# Altium PCB UPCNSL-ABS-EPS_test-v1.0.1.PcbDoc
Units mm, origin at the board's own origin, x right, y up, seen from the top; angles counter-clockwise.
Board outline 89.15 x 98.53 mm, 2 copper layers (Top Layer, Bottom Layer); 85 components, 60 nets, 273 pads, 17 vias.
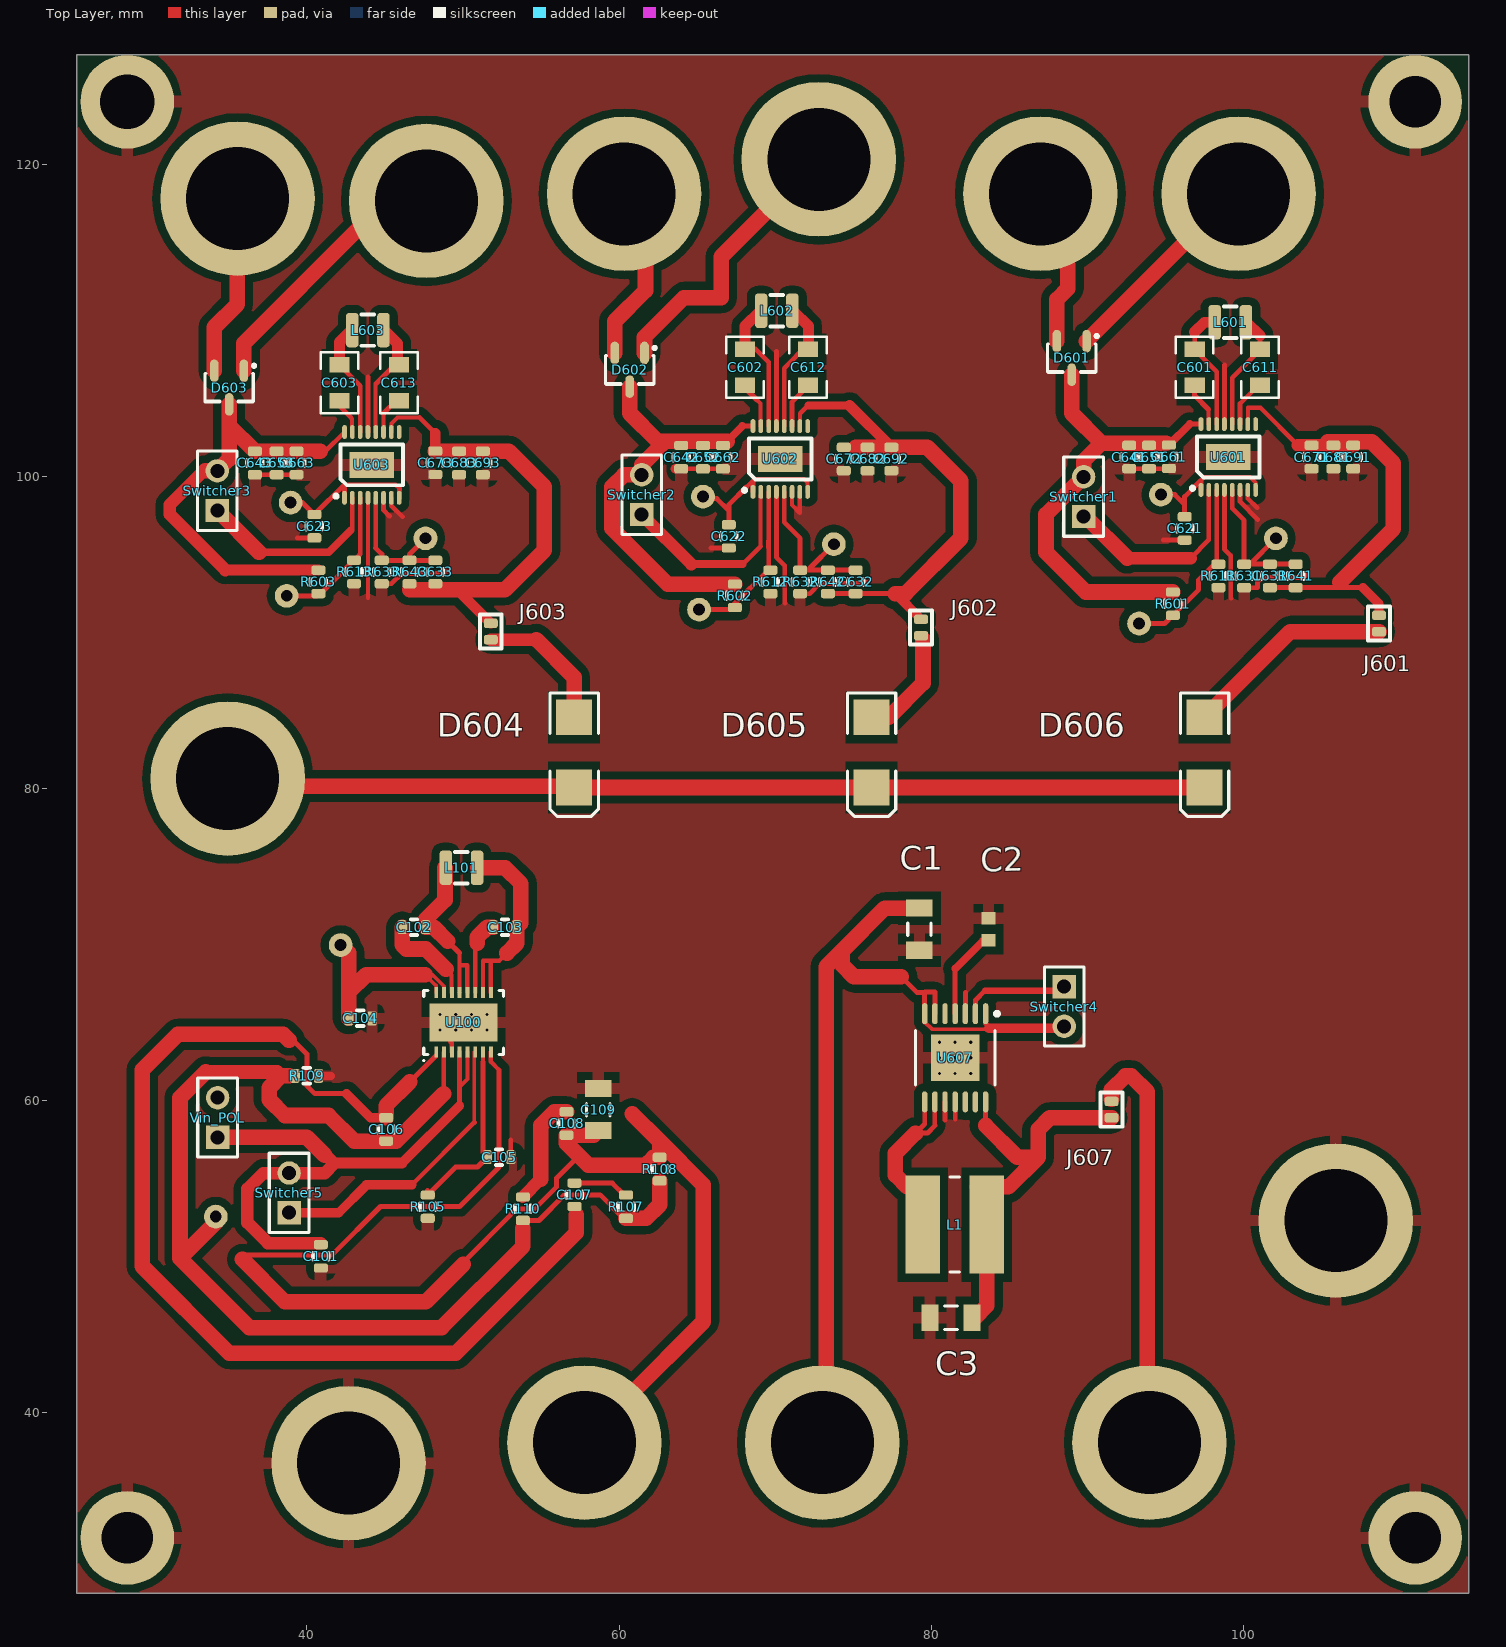
[diagram p0: Top Layer view]
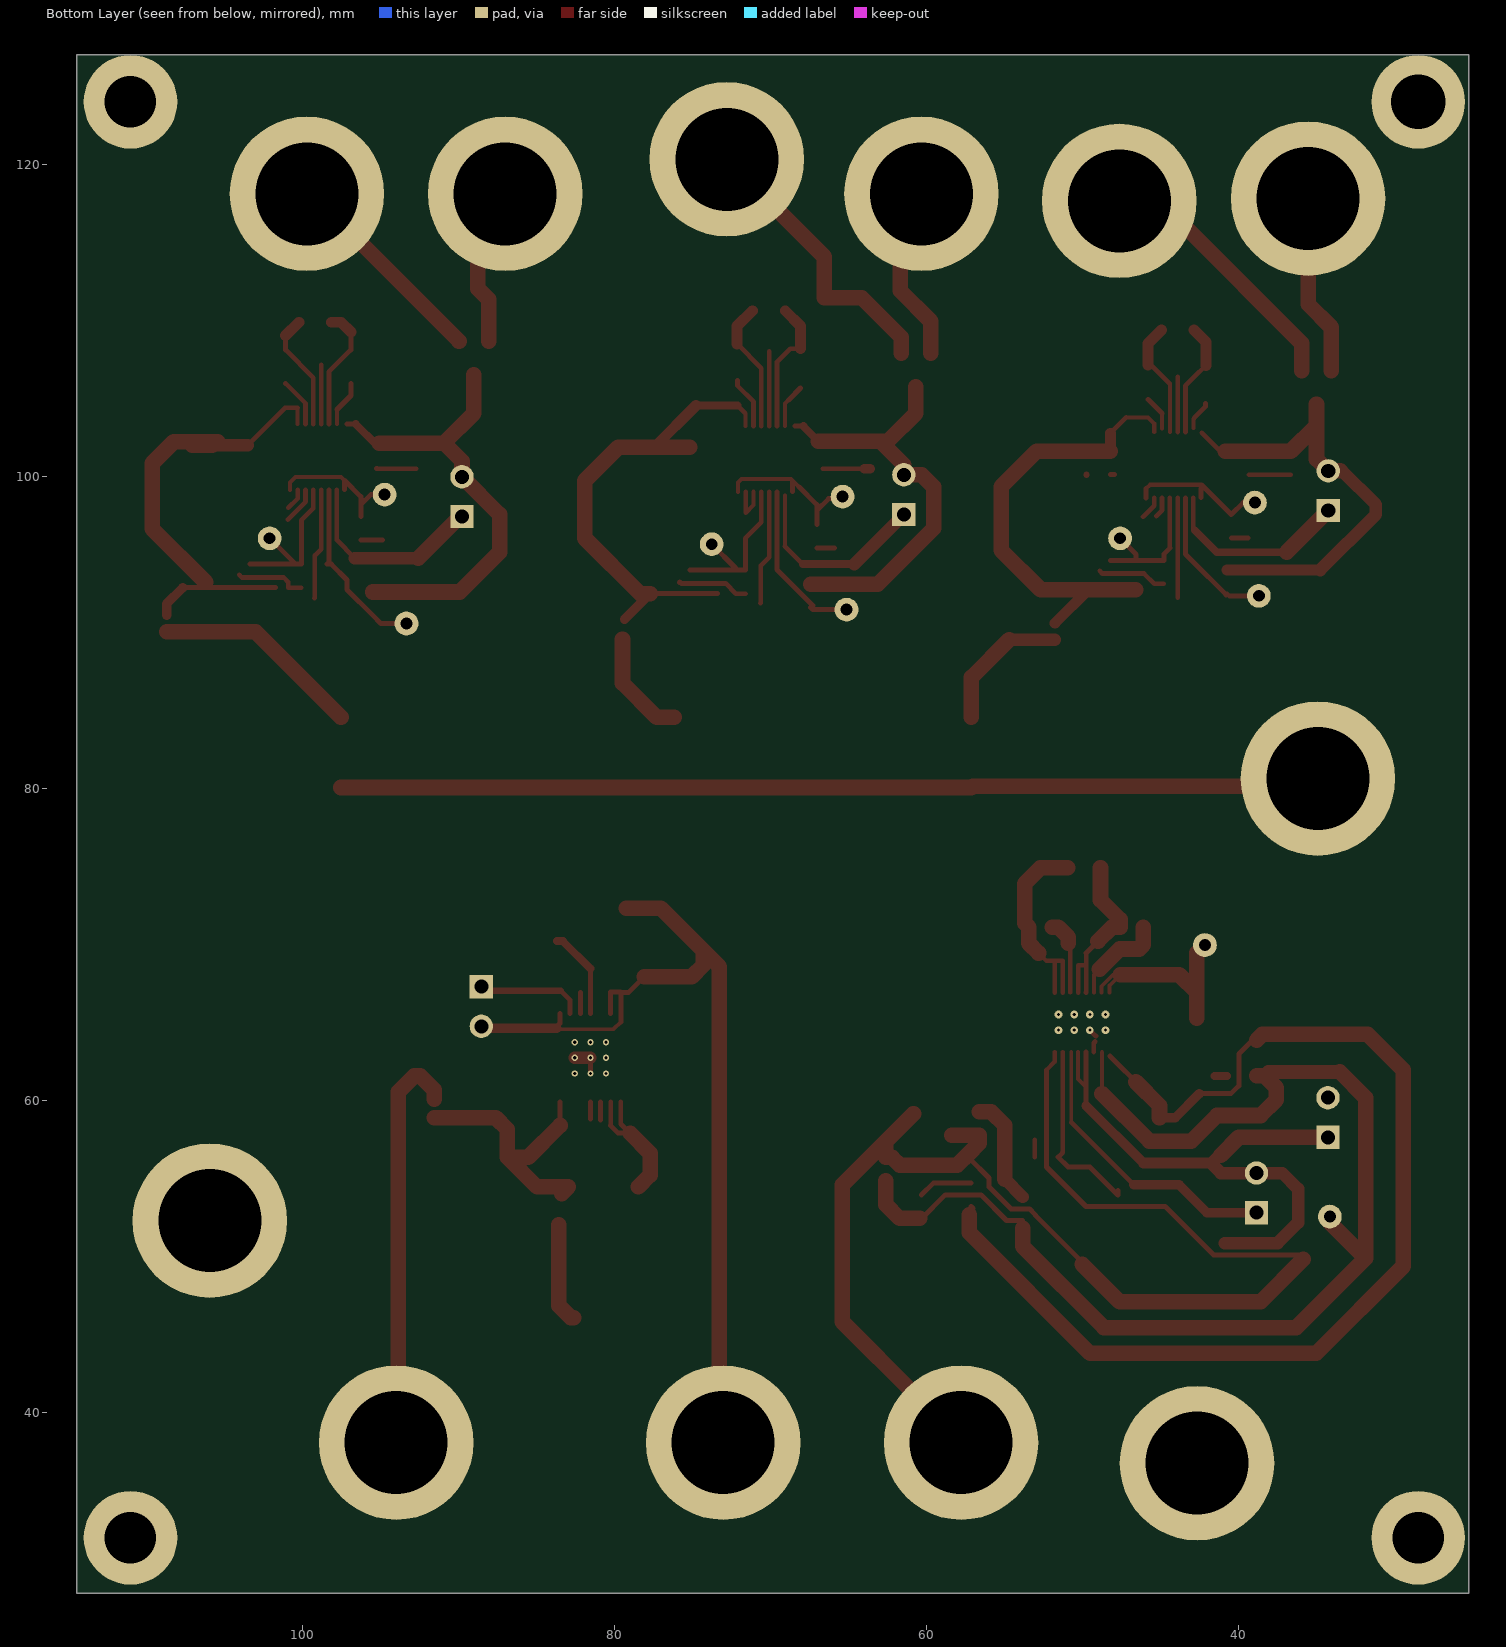
[diagram p1: Bottom Layer view, seen from below]
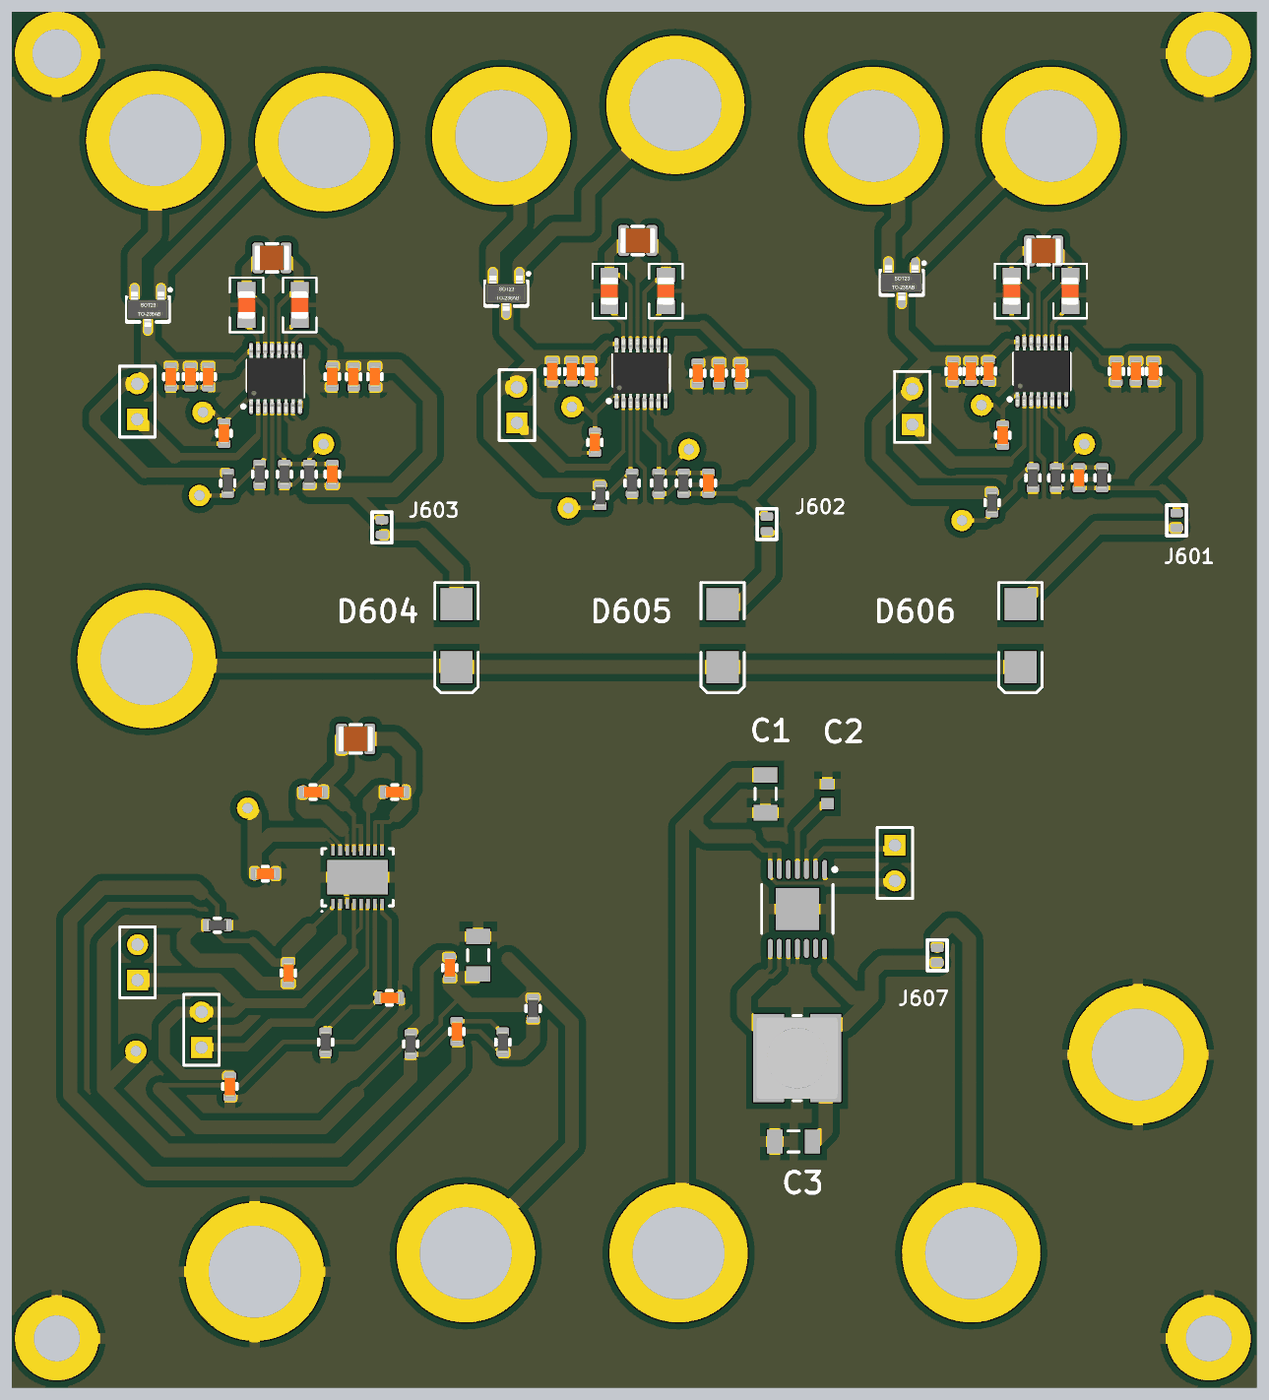
[diagram p2: 3D render of the assembled board from above, using the file's embedded part models]

## Layer stack, top to bottom
Top Solder: solder mask 0.0102, Solder Resist, Dk 3.5
Top Layer: signal copper 0.0356
Dielectric 1: dielectric 0.32, FR-4, Dk 4.8
Bottom Layer: signal copper 0.0356
Bottom Solder: solder mask 0.0102, Solder Resist, Dk 3.5

## Board outline
25.273,28.465 68.961,28.465 114.427,28.465 114.427,127 25.273,127 25.273,76.2

## Design rules (kind name [scope] priority, off if disabled: settings)
Clearance Clearance_GND [InNamedPolygon('GND')] p1: gap=0.5
Clearance Clearance_U [(InComponent('U601') OR InComponent('U100') OR InComponent('U602') OR InComponent('U603') OR InComponent('U607'))] p2: gap=0.2
Clearance [All] p3: gap=0.2
PolygonConnect [All] p1: connectstyle=Relief reliefconductorwidth=0.75 reliefentries=4 polygonreliefangle="90 Angle" airgapwidth=0.5
RoutingVias [All] p1: holewidth=0.711 width=1.27 viastyle="Through Hole" minholewidth=0.2 minwidth=0.4 maxholewidth=0.711 maxwidth=1.27
SolderMaskExpansion [All] p1: expansion=0.102
UnpouredPolygon [All] p1: allowunpoured=FALSE
Width [All] p1: maxlimit=1 minlimit=0.22 preferedwidth=1
29 further rules are at their usual default settings.

## Components (designator, comment, footprint, x,y, rotation, side; value= is the part's Value field where it differs from the comment)
C1 "Cap Semi" C1206 79.248,70.993 r270 top
C2 "Cap Semi" 1608[0603] 83.677,70.993 r90 top
C3 "Cap Semi" C1206 81.264,46.101 r180 top
C101 "CAP0603" CAP0603 40.894,50.038 r90 top
C102 "CAP0603" CAP0603 46.855,71.12 r0 top
C103 "CAP0603" CAP0603 52.697,71.12 r0 top
C104 "CAP0603" CAP0603 43.426,65.278 r180 top
C105 "CAP0603" CAP0603 52.316,56.388 r180 top
C106 "CAP0603" CAP0603 45.077,58.166 r90 top
C107 "CAP0603" CAP0603 57.142,53.975 r90 top
C108 "CAP0603" CAP0603 56.634,58.547 r90 top
C109 "Cap Semi" C1206 58.674,59.436 r90 top
C601 "CAP0805" CAP0805W 96.876,107 r90 top
C602 "CAP0805" CAP0805W 68.072,107 r90 top
C603 "CAP0805" CAP0805W 42.088,106 r90 top
C611 "CAP0805" CAP0805W 101.067,107 r90 top
C612 "CAP0805" CAP0805W 72.111,107 r90 top
C613 "CAP0805" CAP0805W 45.898,106 r90 top
C621 "CAP0603" CAP0603 96.241,96.672 r90 top
C622 "CAP0603" CAP0603 67.031,96.164 r90 top
C623 "CAP0603" CAP0603 40.48,96.811 r90 top
C631 "CAP0603" CAP0603 101.702,93.624 r90 top
C632 "CAP0603" CAP0603 75.159,93.243 r90 top
C633 "CAP0603" CAP0603 48.227,93.878 r90 top
C641 "CAP0603" CAP0603 92.685,101.244 r90 top
C642 "CAP0603" CAP0603 63.983,101.232 r90 top
C643 "CAP0603" CAP0603 36.67,100.863 r90 top
C651 "CAP0603" CAP0603 93.955,101.244 r90 top
C652 "CAP0603" CAP0603 65.38,101.232 r90 top
C653 "CAP0603" CAP0603 38.067,100.863 r90 top
C661 "CAP0603" CAP0603 95.225,101.261 r90 top
C662 "CAP0603" CAP0603 66.65,101.232 r90 top
C663 "CAP0603" CAP0603 39.337,100.863 r90 top
C671 "CAP0603" CAP0603 104.369,101.244 r90 top
C672 "CAP0603" CAP0603 74.397,101.117 r90 top
C673 "CAP0603" CAP0603 48.227,100.875 r90 top
C681 "CAP0603" CAP0603 105.766,101.244 r90 top
C682 "CAP0603" CAP0603 75.921,101.117 r90 top
C683 "CAP0603" CAP0603 49.751,100.863 r90 top
C691 "CAP0603" CAP0603 107.036,101.244 r90 top
C692 "CAP0603" CAP0603 77.445,101.117 r90 top
C693 "CAP0603" CAP0603 51.275,100.863 r90 top
D601 "HSMS-2824-TR1G" SOT23-3 89.002,107.594 r180 top
D602 "HSMS-2824-TR1G" SOT23-3 60.681,106.832 r180 top
D603 "HSMS-2824-TR1G" SOT23-3 35.019,105.689 r180 top
D604 "D Schottky" SMB 57.125,82.321 r270 top
D605 "D Schottky" SMB 76.175,82.321 r270 top
D606 "D Schottky" SMB 97.511,82.321 r270 top
J601 "Jumper_Solderpad" JUMPER_SOLDERPAD 108.687,90.576 r270 top
J602 "Jumper_Solderpad" JUMPER_SOLDERPAD 79.35,90.322 r270 top
J603 "Jumper_Solderpad" JUMPER_SOLDERPAD 51.783,90.068 r270 top
J607 "" JUMPER_SOLDERPAD 91.551,59.436 r90 top
L1 "744052150" WE-TPC-5818-L 81.518,52.07 r0 top
L101 "74479787247" 74479787247 49.903,74.93 r180 top
L601 "" 74479787247 99.162,109.88 r0 top
L602 "" 74479787247 70.104,110.617 r0 top
L603 "" 74479787247 43.909,109.372 r0 top
R105 "RES0603" RES0603 47.744,53.213 r90 top
R107 "RES0603" RES0603 60.444,53.213 r90 top
R108 "RES0603" RES0603 62.603,55.626 r90 top
R109 "RES0603" RES0603 39.997,61.595 r180 top
R110 "RES0603" RES0603 53.84,53.086 r90 top
R601 "RES0603" RES0603 95.479,91.846 r90 top
R602 "RES0603" RES0603 67.42,92.354 r90 top
R603 "RES0603" RES0603 40.742,93.243 r90 top
R611 "RES0603" RES0603 98.4,93.624 r90 top
R612 "RES0603" RES0603 69.698,93.243 r90 top
R613 "RES0603" RES0603 43.02,93.878 r90 top
R631 "RES0603" RES0603 100.051,93.624 r90 top
R632 "RES0603" RES0603 71.603,93.243 r90 top
R633 "RES0603" RES0603 44.798,93.878 r90 top
R641 "RES0603" RES0603 103.353,93.624 r90 top
R642 "RES0603" RES0603 73.381,93.243 r90 top
R643 "RES0603" RES0603 46.576,93.878 r90 top
Switcher1 "" HDR1X2 89.764,97.434 r90 top
Switcher2 "" HDR1X2 61.451,97.561 r90 top
Switcher3 "" HDR1X2 34.265,97.815 r90 top
Switcher4 "" HDR1X2 88.519,67.31 r270 top
Switcher5 "" HDR1X2 38.862,52.832 r90 top
U100 "LTC3112EDHD#PBF" LT-DHD-16_V 50.038,65.024 r90 top
U601 "LTC3129IMSE" MSOP-16 99.035,101.244 r0 top
U602 "LTC3129IMSE" MSOP-16 70.333,101.117 r0 top
U603 "LTC3129IMSE" MSOP-16 44.163,100.736 r0 top
U607 "LM2852YMXA-3.3/NOPB" MXA14A_L 81.534,62.754 r270 top
Vin_POL "Vin_3.8V" HDR1X2 34.282,57.658 r90 top

## Footprints (in the part's own frame and the unit in brackets; to place one, negate y for a bottom-side part, rotate by r counter-clockwise, add the part's x,y. Pads: shape width x height; smd on the part's side, far side on the other; paste and mask are expansions set on the pad)
1608[0603] [mm] "Chip Capacitor, Body 1.6x0.8mm, IPC High Density"
  rect 0.8x0.9 smd: 1(-0.7,0) 2(0.7,0)
  body extent -0.87,-0.48 0.87,0.48, height 1.3
74479787247 [mm] "INDUCTOR, 4.7UH, 1.25A, 40MHZ"
  rrect50% 0.8x2.2 smd: 1(-1,0) 2(1,0)
  silkscreen extent -0.4,-1 0.4,1, body extent -1.25,-0.9 1.25,0.9, height 1.8
C1206 [mm] "Chip Capacitor, Body 3.2x1.6mm, IPC High Density"
  rect 1.1x1.7 smd: 1(-1.35,0) 2(1.35,0)
  silkscreen extent -0.4,-0.75 0.4,0.75, body extent -1.7,-0.9 1.7,0.9, height 1.3
CAP0603 [mm] "Capacitor Chip Inductor, Body 0.6x0.3mm, IPC High Density"
  rrect50% 0.6x0.9 smd: 1(-0.75,0) 2(0.75,0)
  silkscreen extent -0.2,-0.5 0.2,0.5, body extent -0.76,-0.38 0.76,0.38, height 0.76
CAP0805W [mm] "capacitor 0805 wave soldering"
  rect 1x1.3 smd: 1(-1.15,0) 2(1.15,0)
  silkscreen extent -1.95,-1.2 1.95,1.2, body extent -1,-0.63 1,0.63, height 0.78
HDR1X2 [mm] "Connector; Header; 2 Position"
  rect 1.5x1.5 hole 0.9: 1(0,0)
  round 1.5 hole 0.9: 2(2.54,0)
  silkscreen extent -1.27,-1.27 3.81,1.27
JUMPER_SOLDERPAD [mm]
  rrect50% 0.6x0.9 smd: 1(-0.525,0) 2(0.525,0)
  silkscreen extent -1.1,-0.7 1.1,0.7
LT-DHD-16_V [mm] "SON, 16-Leads, Body 5x4mm, Pitch 0.5mm, Thermal Pad 4.34x2.44mm"
  rect 0.7x0.25 smd: 1(-1.9,1.75) 2(-1.9,1.25) 3(-1.9,0.75) 4(-1.9,0.25) 5(-1.9,-0.25) 6(-1.9,-0.75) 7(-1.9,-1.25) 8(-1.9,-1.75) 9(1.9,-1.75) 10(1.9,-1.25) 11(1.9,-0.75) 12(1.9,-0.25) 13(1.9,0.25) 14(1.9,0.75) 15(1.9,1.25) 16(1.9,1.75)
  rect 2.44x4.34 smd: 17(0,0)
  silkscreen extent -2.5,-2.55 2.05,2.6, body extent -2,-2.5 2,2.5, height 0.8
MSOP-16 [mm] "16-Lead Plastic MSOP, Exposed Die Pad"
  oval 0.3x0.889 smd: 1(-1.75,-2.107) 2(-1.25,-2.107) 3(-0.75,-2.107) 4(-0.25,-2.107) 5(0.25,-2.107) 6(0.75,-2.107) 7(1.25,-2.107) 8(1.75,-2.107) 9(1.75,2.107) 10(1.25,2.107) 11(0.75,2.107) 12(0.25,2.107) 13(-0.25,2.107) 14(-0.75,2.107) 15(-1.25,2.107) 16(-1.75,2.107)
  rect 2.845x1.651 smd: 17(0,0)
  silkscreen extent -2.4,-2.1 2,1.3, body extent -2.02,-2.45 2.02,2.45, height 0.96
MXA14A_L [mm] "TSOP, 14-Leads, Body 5x4.4mm, Pitch 0.65mm, Thermal Pad, IPC High Density"
  oval 1.35x0.35 smd: 1(-2.825,1.95) 2(-2.825,1.3) 3(-2.825,0.65) 4(-2.825,0) 5(-2.825,-0.65) 6(-2.825,-1.3) 7(-2.825,-1.95) 8(2.825,-1.95) 9(2.825,-1.3) 10(2.825,-0.65) 11(2.825,0) 12(2.825,0.65) 13(2.825,1.3) 14(2.825,1.95)
  rect 3x3.1 smd: 15(0,0)
  silkscreen extent -2.95,-2.55 1.75,2.8, body extent -2.25,-2.55 2.25,2.55, height 1.1
RES0603 [mm] "Resistor Chip Inductor, Body 0.6x0.3mm, IPC High Density"
  rrect50% 0.6x0.9 smd: 1(-0.75,0) 2(0.75,0)
  silkscreen extent -0.2,-0.5 0.2,0.5, body extent -0.76,-0.38 0.76,0.38, height 0.76
SMB [mm] "DO-214-AA/SMB; 2 C-Bend Leads; Body 5.3 x 3.6 mm, inc. leads (LxW)"
  rect 2.3x2.3 smd: 1(-2.25,0) 2(2.25,0)
  silkscreen extent -3.8,-1.55 4.1,1.55
SOT23-3 [mm] "SOT-23-3; 3 Leads; Body 3 x 3 mm, inc. leads (LxW max)"
  oval 0.55x1.45 smd: 1(-0.95,-1.075) 2(0.95,-1.075) 3(0,1.075)
  silkscreen extent -1.7,-1.5 1.55,0.9, body extent -1.5,-1.25 1.5,1.25, height 1.09
WE-TPC-5818-L [mm] "SMD Inductor, 2-Leads, Body 5.8x5.8x2.0 mm"
  rect 2.2x6.3 smd: 1(-2.05,0) 2(2.05,0)
  silkscreen extent -0.3,-3.05 0.3,3.05, body extent -2.9,-2.9 2.9,2.9, height 2

## Part data
C1 C2 C3 C109: "Capacitor (Semiconductor SIM Model)"
C101 C102 C103 C104 C105 C106 C107 C108 C621 C622 C623 C631 C632 C633 C641 C642 C643 C651 C652 C653 C661 C662 C663 C671 C672 C673 C681 C682 C683 C691 C692 C693: "Capacitor"
C601 C602 C603 C611 C612 C613: library part CAP0603, "Capacitor"
D601 D602 D603: "DIODE, RF, SCHOTTKY, DUAL, SOT-23"
D604 D605 D606: "Schottky Diode"
J607: library part Jumper_Solderpad, "Jumper_Solderpad"
L1: "SMD Shielded Tiny Power Inductor WE-TPC, L = 15.0 µH"
L101: "INDUCTOR, 4.7UH, 1.25A, 40MHZ"
L601 L602 L603: library part 74479787247, "INDUCTOR, 4.7UH, 1.25A, 40MHZ"
R105 R107 R108 R109 R110 R601 R602 R603 R611 R612 R613 R631 R632 R633 R641 R642 R643: "Resistor"
Switcher1 Switcher2 Switcher3 Switcher4 Switcher5 Vin_POL: library part "Header 2", "Header, 2-Pin"
U100: "2.5 A Synchronous Buck-Boost DC/DC Converter, 16-pin SON (DHD-16), -40 to 125 degC, Pb-Free"
U601 U602 U603: library part LTC3129, "15V, 200mA Synchronous Buck-Boost DC/DC Converter with 1.3µA Quiescent Current"
U607: "2A 500/1500kHz Synchronous SIMPLE SWITCHER® Buck Regulator, 14-pin TSSOP-EP, Pb-Free"

## Free pads (board coordinates)
  round 6 hole 3.5: 0(28.5,124)
  round 9.9 hole 6.6: 0(35.56,117.805) 1(47.65,117.653) 2(60.325,118.11) 3(72.796,120.32) 5(86.995,118.11) 6(99.695,118.11) 7(105.918,52.324) 8(93.98,38.1) 9(57.785,38.1) 10(42.672,36.779) 11(34.925,80.645) 12(73.025,38.1)
  round 1.524 hole 0.762: 0(42.164,69.977) 0(102.083,96.037) 1(38.964,98.323) 1(93.32,90.576) 2(65.38,98.704) 2(73.762,95.656) 3(65.126,91.465) 3(94.717,98.831) 4(47.6,96.037) 5(38.71,92.354) 6(34.163,52.578)
  round 6 hole 3.3: 1(111,124) 2(28.5,32) 3(111,32)

## Via types
v1: diameter 0.4, hole 0.2, Top Layer to Bottom Layer, 9 vias
v2: diameter 0.5, hole 0.2, Top Layer to Bottom Layer, 8 vias

## Nets (pads, with @x,y where several pads share a name; then routed paths per layer and width w, separated by ;. In a path a pad name is that pad's centre, name@x,y a point inside that pad or via, vN(x,y) a via of type N, cw(c..) or ccw(c..) an arc to the next point about the centre after c; other vN are vias at no path point)
GND: C1.2 C2.2 C3.2 C101.1 C104.1 C105.1 C109.2 C621.1 C622.1 C623.1 C641.1 C642.1 C643.1 C651.1 C652.1 C653.1 C661.1 C662.1 C663.1 C671.1 C672.1 C673.1 C681.1 C682.1 C683.1 C691.1 C692.1 C693.1 pad.0@28.5,124 pad.1@111,124 pad.2@28.5,32 pad.3@111,32 pad.7 pad.10 R105.1 R109.1 R611.1 R612.1 R613.1 R631.1 R632.1 R633.1 U100.3 U100.17 U601.4 U601.6 U601.7 U601.13 U601.17 U602.4 U602.6 U602.7 U602.13 U602.17 U603.4 U603.6 U603.7 U603.13 U603.17 U607.3 U607.10 U607.11 U607.15 | length 77.2
  Top Layer w0.28: 43.913,92.231 U603.4 ; U602.6 71.083,98.168 71.583,97.668 U602.7
  Top Layer w0.3: C643.1 C653.1 C663.1 ; 39.397,96.061 C623.1 ; U603.13 43.913,106.38 ; R633.1 45.418,93.128 46.068,93.778 48.738,93.778 48.909,93.95 ; U603.6 44.913,97.835 45.288,97.46 ; U603.7 45.413,98.123 46.126,97.409 ; U100.3@49.28,63.124 49.28,63.699 ; C105.1 53.066,57.511 ; C642.1 C652.1 C662.1 ; 65.876,95.414 C622.1 ; U602.4 70.083,94.818 70.612,94.289 70.612,91.897 70.637,91.872 ; U602.13 70.083,106.927 70.083,108.026 ; R632.1 72.223,92.493 72.873,93.143 75.705,93.143 75.805,93.243 75.841,93.207 ; 80.884,58.748 U607.10 ; 81.534,58.826 U607.11 ; C641.1 C651.1 C661.1@95.208,100.494 ; 94.857,95.922 C621.1 ; U601.4 98.785,95.326 99.166,94.945 99.187,94.945 99.187,94.744 99.199,94.732 99.199,92.215 99.212,92.202 ; U601.13 98.785,107.164 ; U601.6 99.785,98.373 100.92,97.237 ; R631.1 100.901,92.874 100.901,93.231 101.194,93.524 103.864,93.524 104.035,93.696 ; U601.7 100.285,98.587 100.884,97.988
  Top Layer w0.32: C673.1@47.957,100.125 C673.1 ; U100.17@49.149,64.135 v2(49.538,64.524) ; 49.195,63.784 49.28,63.699 ; v1(81.534,61.754) U607.15@81.534,62.484 ; U607.3 82.184,66.944 ; C661.1@95.208,100.494 C661.1
  Top Layer w0.4: C683.1@49.751,100.093 C683.1
  Top Layer w0.5: R109.1 41.553,61.595
  Top Layer w0.6: C642.1@63.602,100.482 C642.1
  Top Layer w0.8: v1(81.534,62.754) v1(82.534,62.754) ; pad.7@105.664,52.578 pad.7
  other v1: 80.534,61.754 82.534,61.754 80.534,62.754 80.534,63.754 81.534,63.754 82.534,63.754
  other v2: 48.538,64.524 50.538,64.524 51.538,64.524 48.538,65.524 49.538,65.524 50.538,65.524 51.538,65.524
NetC1_1: C1.1 pad.12 Switcher4.2 U607.1 U607.6 U607.7 | length 54.8
  Top Layer w0.22: 80.043,64.594 83.693,64.594
  Top Layer w0.26: U607.7@79.584,65.053 80.043,64.594
  Top Layer w0.32: 78.089,67.945 79.103,66.931 79.584,66.931 ; U607.7@79.584,65.053 U607.7 79.584,66.931 ; U607.6 80.234,66.959 79.612,66.959 79.584,66.931 ; U607.1 83.484,64.958 83.693,64.749 ; Switcher4.2@88.392,64.643 Switcher4.2@88.519,64.516
  Top Layer w0.6: 83.693,64.643 Switcher4.2@88.392,64.643
  Top Layer w1: pad.12@73.279,42.291 73.279,68.596 74.295,69.612 ; 78.089,67.945 75.041,67.945 74.295,68.691 74.295,69.612 ; C1.1@79.232,72.343 77.026,72.343 74.295,69.612
NetC2_1: C2.1 U607.4 | length 5.8
  Top Layer w0.32: U607.4 81.534,68.469
  Top Layer w0.5: 81.534,68.469 83.296,70.231 C2.1@83.677,70.231
NetC3_1: C3.1 J607.1 L1.2 U607.14 | length 24.3
  Top Layer w0.32: 83.484,58.42 U607.14
  Top Layer w1: C3.1 82.788,46.101 83.568,46.881 L1.2 ; L1.2@83.376,54.056 82.949,54.483 84.947,54.483 86.852,56.388 ; 83.484,58.42 85.516,56.388 86.852,56.388 ; J607.1 87.597,58.911 86.852,58.166 86.852,56.388
NetC101_2: C101.2 Switcher5.2 U100.4 U100.5 Vin_POL.1 | length 38
  Top Layer w0.25: 49.78,60.884 50.288,61.392 U100.5
  Top Layer w0.3: 49.78,59.686 49.78,60.884 U100.4@49.78,63.124
  Top Layer w0.6: 46.101,56.007 49.78,59.686
  Top Layer w0.7: 40.64,57.15 41.783,56.007 46.101,56.007
  Top Layer w0.8: C101.2@40.894,50.888 37.504,50.888 36.195,52.197 36.195,54.356 37.211,55.372 Switcher5.2 41.148,55.372 41.783,56.007
  Top Layer w1: Vin_POL.1 39.997,57.658 41.14,56.515
NetC102_1: C102.1 U100.14 | length 5.7
  Top Layer w0.26: U100.14@49.28,66.924 49.28,68.06
  Top Layer w1: C102.1 46.105,69.989 46.371,69.723 47.617,69.723 48.916,68.424
NetC102_2: C102.2 L101.2 U100.12 U100.13 | length 12
  Top Layer w0.28: U100.13@49.776,66.928 49.776,69.469
  Top Layer w0.3: 49.793,68.749 49.853,68.69 50.284,68.69 U100.12@50.284,66.928
  Top Layer w0.32: 49.014,70.231 49.776,69.469 ; U100.13@49.776,66.928 U100.13@49.78,66.924
  Top Layer w1: L101.2@48.853,74.93 48.853,72.864 47.605,71.616 C102.2 48.125,71.12 49.014,70.231
NetC103_1: C103.1 U100.11 | length 4.9
  Top Layer w0.28: U100.11@50.792,66.936 50.792,69.977 50.919,70.104
  Top Layer w1: 50.919,70.104 50.919,70.485 51.554,71.12 C103.1
NetC103_2: C103.2 L101.1 U100.9 U100.10 | length 13.8
  Top Layer w0.28: U100.10@51.28,66.924 51.28,68.961 52.316,68.961 52.824,69.469 ; U100.9 51.788,68.951
  Top Layer w1: L101.1@50.953,74.93 52.697,74.93 53.713,73.914 53.713,71.386 C103.2 53.447,70.092 52.824,69.469
NetC104_2: C104.2 pad.0@42.164,69.977 U100.15 U100.16 | length 13.2
  Top Layer w0.25: 47.571,68.072 48.242,67.401 ; 48.052,68.072 48.788,67.336 U100.15 ; U100.16 48.288,67.401
  Top Layer w1: pad.0@42.164,69.977 42.676,69.465 42.676,66.941 ; C104.2 42.676,66.941 ; 47.571,68.072 43.807,68.072 42.676,66.941
NetC105_2: C105.2 R105.2 U100.7 | length 12
  Top Layer w0.27: 51.28,62.484 U100.7@51.28,63.124
  Top Layer w0.3: C105.2@51.28,56.674 51.28,62.484
  Top Layer w0.32: R105.2@47.744,54.249 R105.2 49.534,55.753 50.931,55.753 C105.2 C105.2@51.28,56.674
NetC106_1: C106.1 pad.6@34.163,52.578 R107.1 R108.1 R109.2 R110.1 U100.2 | length 78.4
  Top Layer w0.28: 48.76,60.452 U100.2@48.76,63.104
  Top Layer w0.32: R110.1 54.868,52.336 ; 56.507,53.975 58.793,53.975 60.305,52.463 R107.1
  Top Layer w0.33: 54.868,52.336 56.507,53.975
  Top Layer w0.9: 33.52,61.849 38.092,61.849 38.346,61.595
  Top Layer w1: 33.52,61.849 31.869,60.198 31.869,49.911 ; pad.6@34.163,52.205 31.869,49.911 ; 38.854,61.595 38.346,61.595 37.584,60.833 37.584,60.071 38.6,59.055 41.394,59.055 43.033,57.416 C106.1 45.724,57.416 48.76,60.452 ; 53.84,51.816 53.84,50.673 48.633,45.466 36.314,45.466 31.869,49.911 ; R107.1 61.726,52.463 62.603,53.34 R108.1
NetC106_2: C106.2 C107.1 U100.1 | length 73.3
  Top Layer w0.32: 38.727,64.262 39.997,62.992 39.997,60.96 40.505,60.452 42.537,60.452 ; 46.22,60.833 U100.1@48.256,62.869 ; C107.1@57.015,53.098 C107.1
  Top Layer w0.6: 42.537,60.452 44.073,58.916 C106.2
  Top Layer w1: 38.854,63.881 38.473,64.262 31.742,64.262 29.456,61.976 29.456,49.403 35.044,43.815 49.522,43.815 57.269,51.562 57.269,52.705 ; C106.2 45.077,59.69 46.601,61.214
NetC107_2: C107.2 R107.2 | length 3.5
  Top Layer w0.32: C107.2 59.567,54.725 R107.2@60.329,53.963
NetC108_1: C108.1 C109.1 pad.9 R108.2 U100.8 | length 85.6
  Top Layer w0.28: U100.8@51.78,63.124 51.78,62.512 52.316,61.976
  Top Layer w0.32: 35.873,49.843 36.158,50.128 41.619,50.128 44.714,53.223 49.786,53.223 52.316,55.753 52.316,61.976 ; 50.03,49.53 50.03,49.657 53.03,52.657 53.03,52.697 53.409,53.076 54.592,53.076 55.999,54.483 55.999,55.052 57.269,56.322 57.269,56.642
  Top Layer w1: 35.873,49.843 38.6,47.117 47.617,47.117 50.03,49.53 ; C109.1@58.385,57.797 C108.1 56.634,57.277 57.269,56.642 58.031,55.88 61.714,55.88 62.21,56.376 R108.2 62.603,57.404 ; pad.9@60.642,41.084 65.397,45.839 65.397,54.61 62.603,57.404 ; 60.837,59.17 62.603,57.404
NetC108_2: C108.2 R110.2 | length 7.1
  Top Layer w0.8: R110.2 54.983,54.979
  Top Layer w1: 54.983,54.979 54.983,58.42 55.86,59.297 C108.2
NetC601_1: C601.1 U601.15 | length 3
  Top Layer w0.26: U601.15@97.765,103.351 97.765,104.292
  Top Layer w0.32: C601.1@96.875,105.955 96.875,105.182 97.765,104.292
NetC601_2: C601.2 L601.1 U601.14 | length 8
  Top Layer w0.3: 96.875,109.245 96.875,108.103 98.285,106.693 U601.14
  Top Layer w0.7: 96.875,109.245 97.511,109.88 L601.1@98.112,109.88
NetC602_1: C602.1 U602.15 | length 2.8
  Top Layer w0.26: 68.834,104.902 69.063,104.673 U602.15@69.063,103.224
  Top Layer w0.32: C602.1@68.072,105.664 68.834,104.902
NetC602_2: C602.2 L602.1 U602.14 | length 8.8
  Top Layer w0.3: C602.2@68.093,108.171 68.74,108.171 69.583,107.328 U602.14
  Top Layer w0.32: C602.2@68.072,108.192 C602.2@68.093,108.171
  Top Layer w0.7: C602.2@68.072,108.192 68.072,109.635 L602.1@69.054,110.617
NetC603_1: C603.1 U603.15 | length 1.9
  Top Layer w0.26: 42.85,103.734 42.893,103.691 U603.15@42.893,103.099
  Top Layer w0.3: C603.1@42.131,104.47 42.85,103.751 42.85,103.734
  Top Layer w0.32: C603.1@42.131,104.47 C603.1@42.131,104.674
NetC603_2: C603.2 L603.1 U603.14 | length 7.4
  Top Layer w0.3: C603.2@42.097,107.12 42.905,106.312 43.413,105.804 U603.14
  Top Layer w0.7: C603.2@42.097,107.12 42.097,108.61 L603.1@42.859,109.372
NetC611_1: C611.1 U601.11 | length 3.1
  Top Layer w0.3: U601.11 99.785,104.674 C611.1@101.066,105.955
NetC611_2: C611.2 L601.2 U601.12 | length 7.6
  Top Layer w0.3: U601.12 99.285,106.32 101.066,108.102 101.066,109.025
  Top Layer w0.7: L601.2@100.212,109.88 101.066,109.025
NetC612_1: C612.1 U602.11 | length 3.4
  Top Layer w0.3: U602.11 71.083,104.788 72.111,105.816 C612.1@72.111,106.165
NetC612_2: C612.2 L602.2 U602.12 | length 8.4
  Top Layer w0.3: U602.12 70.583,106.937 C612.2@72.136,108.49
  Top Layer w0.7: L602.2@71.154,110.617 72.136,109.635 C612.2@72.136,108.49
NetC613_1: C613.1 U603.11 | length 2.2
  Top Layer w0.26: U603.11@44.913,103.079 44.913,104.039
  Top Layer w0.32: 44.913,104.039 C613.1@45.814,104.939
NetC613_2: C613.2 L603.2 U603.12 | length 7.4
  Top Layer w0.26: U603.12@44.393,102.843 44.393,105.919
  Top Layer w0.32: 44.425,105.943 C613.2@45.644,107.163
  Top Layer w0.7: L603.2@44.959,109.372 45.814,108.517 C613.2@45.814,107.137
NetC621_2: C621.2 pad.3@94.717,98.831 U601.1 U601.8 | length 9.4
  Top Layer w0.26: 97.285,99.748 97.511,99.974 100.432,99.974 100.785,99.621 U601.8
  Top Layer w0.3: U601.1 97.285,99.748
  Top Layer w0.32: pad.3@94.717,98.831 95.605,98.831 96.24,98.196 ; C621.2 96.24,98.196 ; 97.285,99.748 96.24,98.704 96.24,98.196
NetC622_2: C622.2 pad.2@65.38,98.704 U602.1 U602.8 | length 10.4
  Top Layer w0.26: 68.162,99.328 68.682,99.847 71.857,99.847 72.083,99.621 U602.8
  Top Layer w0.3: U602.1 68.583,99.708
  Top Layer w0.32: pad.2@65.38,98.704 65.507,98.577 66.269,98.577 67.03,97.815 ; C622.2 67.03,97.815 ; 68.162,99.328 67.03,98.196 67.03,97.815
NetC623_2: C623.2 pad.1@38.964,98.323 U603.1 U603.8 | length 9.4
  Top Layer w0.26: 42.385,99.466 45.687,99.466 45.933,99.22
  Top Layer w0.3: U603.1 42.413,99.24
  Top Layer w0.32: pad.1@38.964,98.323 39.718,98.323 C623.2 42.385,99.466 ; U603.8@45.933,98.629 45.933,99.22
NetC631_1: C631.1 C671.2 C681.2 C691.2 J601.1 R641.1 U601.10 | length 30.8
  Top Layer w0.26: U601.10@100.305,103.351 100.305,104.419
  Top Layer w0.3: 100.305,104.396 101.095,104.396 103.497,101.994
  Top Layer w0.32: C631.1 R641.1 107.659,92.874
  Top Layer w0.6: 107.659,92.874 108.687,91.846 J601.1
  Top Layer w0.8: 103.497,101.994 C671.2 C681.2
  Top Layer w1: C681.2@105.41,102.223 108.224,102.223 109.601,100.846 109.601,96.639 106.18,93.218 ; C681.2 C691.2
NetC631_2: C631.2 pad.0@102.083,96.037 R631.2 R641.2 U601.5 | length 10.7
  Top Layer w0.3: U601.5 99.285,97.948 99.476,97.757 99.859,97.374 100.05,97.182
  Top Layer w0.32: 100.05,97.182 R631.2 R631.2@100.42,94.374 ; pad.0@102.083,96.037 R631.2@100.42,94.374 ; R641.2 C631.2 R631.2@100.42,94.374
NetC632_1: C632.1 C672.2 C682.2 C692.2 J602.1 R642.1 U602.10 | length 31.6
  Top Layer w0.26: U602.10@71.603,103.224 71.603,104.038
  Top Layer w0.3: 71.607,104.034 72.12,104.546
  Top Layer w0.32: R642.1 C632.1 77.704,92.493
  Top Layer w0.5: 72.12,104.546 74.766,104.546
  Top Layer w0.6: 77.704,92.493 J602.1
  Top Layer w0.7: 74.766,104.546 C692.2
  Top Layer w1: 75.179,101.867 C682.2 C692.2 79.751,101.867 81.898,99.72 81.898,96.037 78.354,92.493 77.704,92.493
NetC632_2: C632.2 pad.2@73.762,95.656 R632.2 R642.2 U602.5 | length 11.3
  Top Layer w0.3: U602.5 70.583,97.057 71.602,96.038
  Top Layer w0.32: 71.602,96.038 R632.2 72.238,93.993 ; pad.2@73.762,95.656 72.238,94.132 72.238,93.993 ; C632.2 R642.2 72.238,93.993
NetC633_1: C633.1 C673.2 C683.2 C693.2 J603.1 R643.1 U603.10 | length 29.8
  Top Layer w0.25: 45.814,103.784 47.211,103.784
  Top Layer w0.26: U603.10 45.413,103.383 45.814,103.784
  Top Layer w0.3: 47.211,103.784 48.227,102.768
  Top Layer w0.7: C673.2 48.227,102.768 ; 49.632,92.744 J603.1
  Top Layer w1: 46.593,92.744 49.632,92.744 52.689,92.744 55.22,95.275 55.22,99.339 52.946,101.613 C693.2 C683.2 C673.2@48.239,101.613
NetC633_2: C633.2 pad.4 R633.2 R643.2 U603.5 | length 9.4
  Top Layer w0.3: 44.413,95.406 U603.5
  Top Layer w0.32: 44.413,95.406 44.798,95.022 R633.2 R643.2 ; pad.4 46.576,95.013 R643.2 ; C633.2 R643.2
NetC641_2: C641.2 C651.2 C661.2 D601.3 R601.2 Switcher1.2 U601.16 | length 29.6
  Top Layer w0.32: C661.2@95.069,101.994 95.208,101.994 C661.2 ; 96.565,103.351 97.13,103.351
  Top Layer w0.5: C661.2 96.565,103.351
  Top Layer w1: D601.3 89.002,104.046 90.915,102.133 ; C661.2@95.069,102.133 90.915,102.133 ; R601.2 89.903,92.596 87.351,95.148 87.351,97.561 Switcher1.2 89.764,100.982 90.915,102.133
NetC642_2: C642.2 C652.2 C662.2 D602.3 R602.2 Switcher2.2 U602.16 | length 27.6
  Top Layer w0.32: 67.892,103.224 68.428,103.224
  Top Layer w0.5: C662.2@66.928,102.26 67.892,103.224
  Top Layer w1: D602.3 60.681,104.046 62.467,102.26 62.975,102.26 ; C662.2@66.928,102.26 62.975,102.26 ; R602.2 63.114,93.104 59.546,96.672 59.546,99.339 60.308,100.101 Switcher2.2 61.451,100.736 62.975,102.26
NetC643_2: C643.2 C653.2 C663.2 D603.3 R603.2 Switcher3.2 U603.16 | length 28.2
  Top Layer w0.3: 41.183,101.613 U603.16@42.378,102.809
  Top Layer w0.7: 34.785,93.993 R603.2
  Top Layer w0.8: 33.376,100.355 31.217,98.196 31.217,97.561 34.785,93.993
  Top Layer w1: 33.503,100.355 Switcher3.2 35.019,101.109 35.019,103.264 ; D603.3 35.019,103.264 ; 40.857,101.613 C663.2 C653.2 C643.2 35.019,103.264
NetD601_1: D601.1 pad.6@99.695,118.11 | length 10.7
  Top Layer w1: D601.1 pad.6@97.512,116.229
NetD601_2: D601.2 pad.5@86.995,118.11 | length 5.2
  Top Layer w1: D601.2 88.052,111.343 88.748,112.039 pad.5@88.748,113.563
NetD602_1: D602.1 pad.3@72.796,120.32 | length 18.4
  Top Layer w1: D602.1 61.631,108.925 64.16,111.454 66.548,111.454 66.548,114.071 pad.3@72.796,120.32
NetD602_2: D602.2 pad.2@60.325,118.11 | length 6.6
  Top Layer w1: D602.2 59.731,109.946 61.697,111.912 pad.2@61.697,113.69
NetD603_1: D603.1 pad.1@47.65,117.653 | length 17.1
  Top Layer w1: D603.1 35.969,108.536 43.409,115.976 43.536,115.976 45.314,117.754 pad.1@47.473,117.754
NetD603_2: D603.2 pad.0@35.56,117.805 | length 7.5
  Top Layer w1: D603.2 34.069,109.557 35.535,111.023 pad.0@35.535,113.69
NetD604_2: D604.2 D605.2 D606.2 pad.11 | length 58.5
  Top Layer w1: pad.11@38.964,80.162 D604.2@57.034,80.162 ; D604.2 D605.2 D606.2
NetJ607_2: J607.2 pad.8 | length 22.1
  Top Layer w1: J607.2@91.551,60.111 91.551,60.706 92.44,61.595 92.821,61.595 93.837,60.579 pad.8@93.837,42.164
NetL1_1: L1.1 U607.8 U607.9 | length 9.5
  Top Layer w0.3: 79.584,58.518 U607.8 ; 80.234,58.406 U607.9
  Top Layer w0.32: 79.584,58.518 78.994,57.928 79.756,57.928 80.234,58.406
  Top Layer w1: L1.1@78.47,54.483 77.708,55.245 77.708,56.642 78.994,57.928
NetR601_1: pad.1@93.32,90.576 R601.1 R611.2 U601.3 | length 11.7
  Top Layer w0.3: R611.2@98.285,94.489 U601.3
  Top Layer w0.32: pad.1@93.32,90.576 94.959,90.576 R601.1 97.13,92.747 97.13,93.37 98.134,94.374 R611.2
NetR602_1: pad.3@65.126,91.465 R602.1 R612.2 U602.3 | length 10.6
  Top Layer w0.3: R612.2@69.583,94.029 69.583,95.438 69.578,95.443 69.578,95.862 69.583,95.867 U602.3
  Top Layer w0.32: pad.3@65.126,91.465 67.281,91.465 R602.1 ; R602.1@67.289,91.735 R612.2@69.583,94.029
NetR603_1: pad.5@38.71,92.354 R603.1 R613.2 U603.3 | length 9.4
  Top Layer w0.254: R603.1@40.603,92.354 R603.1
  Top Layer w0.3: 43.413,95.022 U603.3
  Top Layer w0.32: pad.5@38.71,92.354 R603.1@40.603,92.354 ; R603.1@40.807,92.416 R613.2 43.413,95.022
NetSwitcher1_1: Switcher1.1 U601.2 | length 12.8
  Top Layer w0.3: 96.622,94.767 97.785,95.93 U601.2
  Top Layer w0.6: Switcher1.1 Switcher1.1@89.891,97.434
  Top Layer w0.8: 92.558,94.767 96.622,94.767
  Top Layer w1: Switcher1.1@89.891,97.434 92.558,94.767
NetSwitcher2_1: Switcher2.1 U602.2 | length 12.7
  Top Layer w0.26: 69.071,95.529 U602.2@69.071,98.791
  Top Layer w0.3: 67.928,94.386 69.071,95.529
  Top Layer w0.5: 64.626,94.386 67.928,94.386
  Top Layer w0.8: Switcher2.1 64.626,94.386
NetSwitcher3_1: Switcher3.1 U603.2 | length 12.3
  Top Layer w0.3: 42.913,96.553 U603.2
  Top Layer w0.5: 36.932,95.148 41.408,95.148 42.813,96.553
  Top Layer w1: Switcher3.1 36.932,95.148
NetSwitcher4_1: Switcher4.1 U607.2 | length 6.8
  Top Layer w0.32: U607.2 82.834,66.451 83.439,67.056
  Top Layer w0.4: 83.439,67.056 Switcher4.1@88.519,67.056
NetSwitcher5_1: Switcher5.1 U100.6 | length 18.8
  Top Layer w0.23: 50.736,58.61 U100.6@50.736,63.124
  Top Layer w0.3: 46.736,54.61 50.736,58.61
  Top Layer w0.6: Switcher5.1 42.037,52.832 43.815,54.61 46.736,54.61
VOUT_DC_1: D606.1 J601.2 | length 13.4
  Top Layer w1: D606.1 102.991,90.051 J601.2
VOUT_DC_2: D605.1 J602.2 | length 7
  Top Layer w1: D605.1 77.291,84.571 79.477,86.757 J602.2@79.477,89.56
VOUT_DC_3: D604.1 J603.2 | length 8.9
  Top Layer w0.8: J603.2 54.704,89.543
  Top Layer w1: 54.704,89.543 57.125,87.122 D604.1
pads on no net: U601.9 U602.9 U603.9 U607.5 U607.12 U607.13 Vin_POL.2

## Polygon pours and split planes (outlines as drawn)
GND on Top Layer "GND" (solid, pour order 3): 25.273,127 114.427,127 114.427,28.465 25.273,28.465

## Silkscreen, mask and mechanical layers (free items; w line width, h text height)
Mechanical 1:
  lines w1.4: 24.573,28.465 ccw(c25.273,28.465) 25.273,27.765 ; 24.573,28.465 ccw(c25.273,28.465) 25.273,27.765 ; 24.573,28.465 24.573,76.2 24.573,127 ; 24.573,127 cw(c25.273,127) 25.273,127.7 ; 24.573,127 cw(c25.273,127) 25.273,127.7 ; 25.273,27.765 68.961,27.765 114.427,27.765 ; 25.273,127.7 114.427,127.7 ; 114.427,27.765 ccw(c114.427,28.465) 115.127,28.465 ; 114.427,27.765 ccw(c114.427,28.465) 115.127,28.465 ; 114.427,127.7 cw(c114.427,127) 115.127,127 ; 114.427,127.7 cw(c114.427,127) 115.127,127 ; 115.127,28.465 115.127,127